# Altium PCB servo_pwr.PcbDoc
Units mm, origin at the board's own origin, x right, y up, seen from the top; angles counter-clockwise.
Board outline 80.6 x 215 mm, 2 copper layers (Top Layer, Bottom Layer), stack 1.57 mm thick; 135 components, 82 nets, 364 pads, 0 vias.
Unrouted connection lines stored in the file: 269.
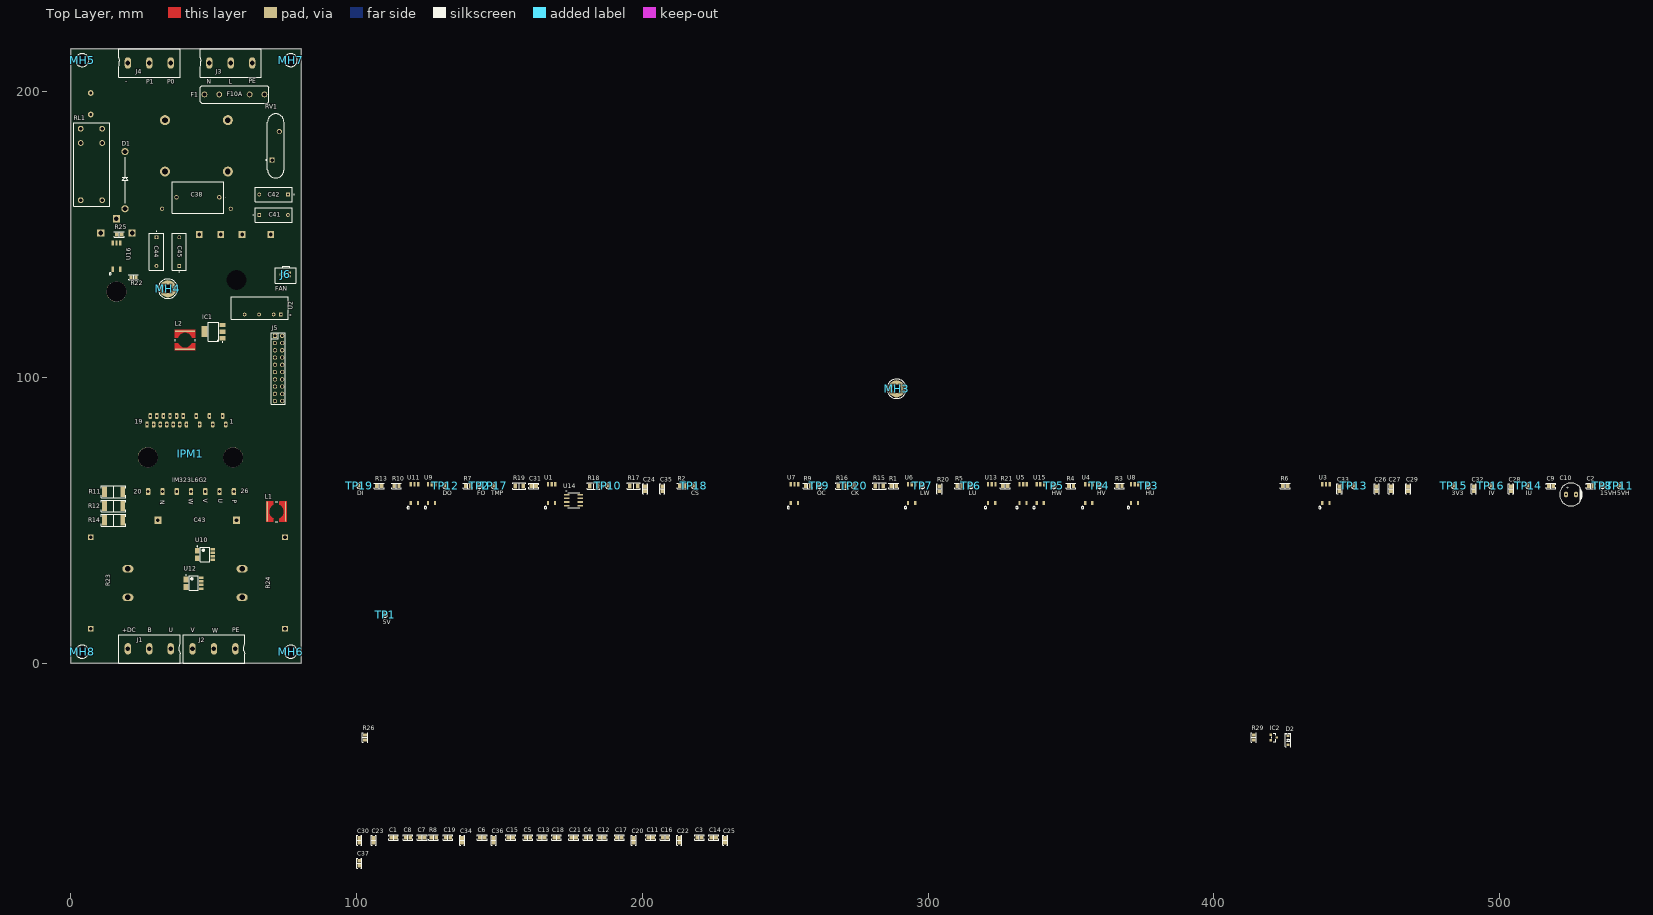
[diagram p0: Top Layer view]
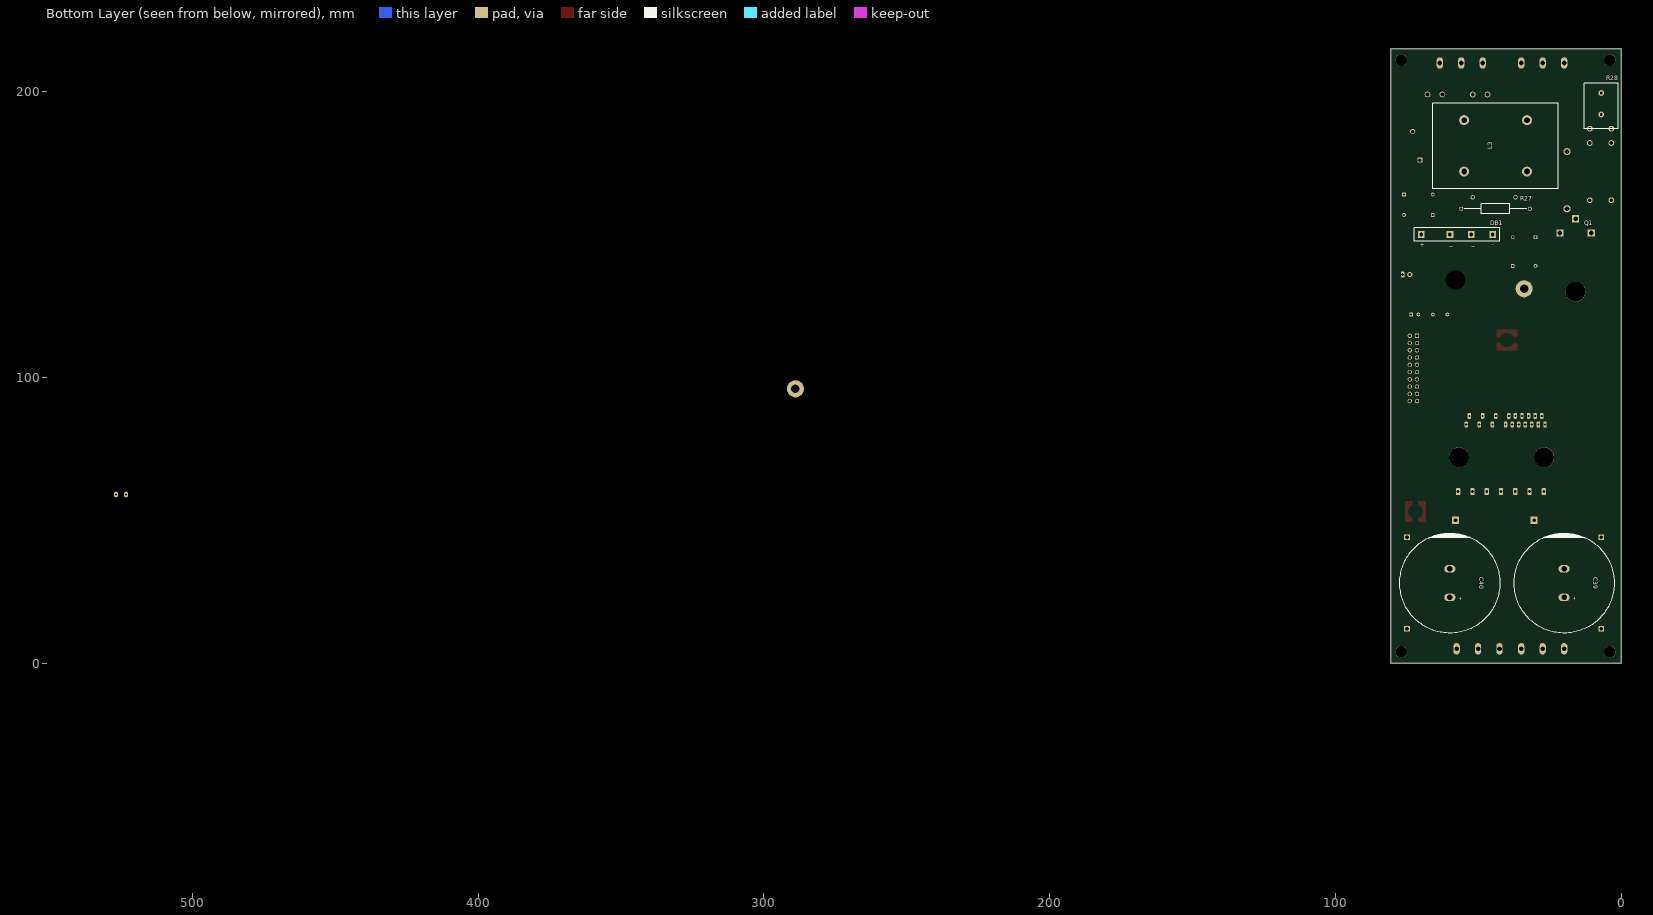
[diagram p1: Bottom Layer view, seen from below]

## Layer stack, top to bottom
Top Solder: solder mask 0.0127, Solder Resist, Dk 3.8
Top Layer: signal copper 0.035
Dielectric: core 1.5, FR-4, Dk 4.5
Bottom Layer: signal copper 0.035
Bottom Solder: solder mask 0.0127, Solder Resist, Dk 3.8

## Board outline
0,0 80.6,0 80.6,215 0,215

## Design rules (kind name [scope] priority, off if disabled: settings)
BoardOutlineClearance [All] p1: gap=0.2 ignorepadtopadclearanceinfootprint=FALSE
Clearance [All] p1: gap=0.127 ignorepadtopadclearanceinfootprint=FALSE except(0.25: Arc-Hole Track-Hole SMDPad-Hole THPad-Hole Via-Hole Fill-Hole Poly-Hole Region-Hole Text-Hole)
ComponentClearance [All] p1: gap=0.127 collisioncheckmode=3 verticalgap=0.127 showdistances=TRUE
DiffPairsRouting [All] p1: maxlimit=0.254 minlimit=0.127 mostfreqgap=0.127 toplayer_minwidth=0.127 toplayer_maxwidth=25.4 toplayer_prefwidth=0.127 bottomlayer_minwidth=0.127 bottomlayer_maxwidth=25.4 bottomlayer_prefwidth=0.127 maxuncoupledlength=12.7
Height [All] p1: minheight=0 maxheight=1816.048 prefheight=12.7
HoleSize [All] p1: absolutevalues=TRUE maxlimit=6.3 minlimit=0.3 maxpercent=80.000 minpercent=20.000
HoleToHoleClearance [All] p1: gap=0.25 allowstackedmicrovias=FALSE
MinimumAnnularRing [All] p1: minimumring=0.076
MinimumSolderMaskSliver [All] p1: minsoldermaskwidth=0
PlaneClearance [All] p1: clearance=0.127
PlaneConnect PlaneConnectPowerPads [InPadClass('PowerPads')] p1: planeconnectstyle=Direct reliefexpansion=0.508 reliefentries=4 reliefconductorwidth=0.254 reliefairgap=0.254
PlaneConnect [All] p2: pad.planeconnectstyle=Relief pad.reliefexpansion=0.3 pad.reliefentries=4 pad.reliefconductorwidth=0.127 pad.reliefairgap=0.127 via.planeconnectstyle=Direct via.reliefexpansion=0.3 via.reliefentries=4 via.reliefconductorwidth=0.127 via.reliefairgap=0.127
PolygonConnect PolygonConnectPowerPads [All vs (InPadClass('PowerPads'))] p1: connectstyle=Direct reliefconductorwidth=0.254 reliefentries=4 polygonreliefangle="90 Angle" airgapwidth=0.254
PolygonConnect [All] p2: thpad.connectstyle=Relief thpad.reliefconductorwidth=0.127 thpad.reliefentries=4 thpad.polygonreliefangle="90 Angle" thpad.airgapwidth=0.127 smdpad.connectstyle=Relief smdpad.reliefconductorwidth=0.127 smdpad.reliefentries=4 smdpad.polygonreliefangle="90 Angle" smdpad.airgapwidth=0.127 via.connectstyle=Direct via.reliefconductorwidth=0.127 via.reliefentries=4 via.polygonreliefangle="90 Angle" via.airgapwidth=0.127
RoutingVias [All] p1: holewidth=0.3 width=0.6 viastyle="Through Hole" minholewidth=0.3 minwidth=0.6 maxholewidth=0.6 maxwidth=6.6
SilkToSilkClearance [All] p1: silktosilkclearance=0
SilkToSolderMaskClearance [IsPad] p1: minsilkscreentomaskgap=0.127 clearancetoexposedcopper=TRUE
SolderMaskExpansion [All] p1: expansion=0.075 istentingtop=FALSE
Width [All] p1: maxlimit=25.4 minlimit=0.127 preferedwidth=0.127 minimp=50.000000 maximp=50.000000 favimp=50.000000
20 further rules are at their usual default settings.

## Classes and differential pairs
component class servo_pwr: J1 J2 J3 J4 J5 J6 MH3 MH4 MH5 MH6 MH7 MH8
component class igbt_output: C1 C2 C3 C4 C5 C6 C7 C8 C9 C10 C11 C12 C13 C14 C15 C16 C17 C18 C19 C20 C21 C22 C23 C24 C25 C26 C27 C28 C29 C30 C31 C32 C33 C34 C35 C36 IC1 IPM1 L1 L2 R1 R2 R3 R4 R5 R6 R7 R8 R9 R10 R11 R12 R13 R14 R15 R16 R17 R18 R19 R20 R21 TP1 TP2 TP3 TP4 TP5 TP6 TP7 TP8 TP9 TP10 TP11 TP12 TP13 TP14 TP15 TP16 TP17 TP18 TP19 TP20 U1 U2 U3 U4 U5 U6 U7 U8 U9 U10 U11 U12 U13 U14 U15
component class DClink: C37 C38 C39 C40 C41 C42 C43 C44 C45 D1 D2 DB1 F1 IC2 L3 Q1 R22 R23 R24 R25 R26 R27 R28 R29 RL1 RV1 U16

## Components (designator, comment, footprint, x,y, rotation, side; value= is the part's Value field where it differs from the comment)
C1 "2.2 µF" "CAP 0805_2012" 113,-61 r0 top
C2 "22 µF" "CAP 0805_2012" 532,62 r0 top
C3 "2.2 µF" "CAP 0805_2012" 220,-61 r0 top
C4 "2.2 µF" "CAP 0805_2012" 181,-61 r0 top
C5 "2.2 µF" "CAP 0805_2012" 160,-61 r0 top
C6 "2.2 µF" "CAP 0805_2012" 144,-61 r0 top
C7 "2.2 µF" "CAP 0805_2012" 123,-61 r0 top
C8 "2.2 µF" "CAP 0805_2012" 118,-61 r0 top
C9 "22 µF" "CAP 0805_2012" 518,62 r0 top
C10 "100 µF" "CAP AL TH D8 L3.5 H12.5" 525,59 r0 top
C11 "2.2 µF" "CAP 0805_2012" 203,-61 r0 top
C12 "2.2 µF" "CAP 0805_2012" 186,-61 r0 top
C13 "2.2 µF" "CAP 0805_2012" 165,-61 r0 top
C14 "2.2 µF" "CAP 0805_2012" 225,-61 r0 top
C15 "2.2 µF" "CAP 0805_2012" 154,-61 r0 top
C16 "2.2 µF" "CAP 0805_2012" 208,-61 r0 top
C17 "2.2 µF" "CAP 0805_2012" 192,-61 r0 top
C18 "2.2 µF" "CAP 0805_2012" 170,-61 r0 top
C19 "2.2 µF" "CAP 0805_2012" 132,-61 r0 top
C20 "2.2 µF" "CAP 0805_2012" 197,-62 r90 top
C21 "2.2 µF" "CAP 0805_2012" 176,-61 r0 top
C22 "2.2 µF" "CAP 0805_2012" 213,-62 r90 top
C23 "2.2 µF" "CAP 0805_2012" 106,-62 r90 top
C24 "10000 pF" "CAP 0805_2012" 201,61 r90 top
C25 "2.2 µF" "CAP 0805_2012" 229,-62 r90 top
C26 "22 µF" "CAP 0805_2012" 457,61 r90 top
C27 "22 µF" "CAP 0805_2012" 462,61 r90 top
C28 "4700 pF" "CAP 0805_2012" 504,61 r90 top
C29 "0.1 µF" "CAP 0805_2012" 468,61 r90 top
C30 "2.2 µF" "CAP 0805_2012" 101,-62 r90 top
C31 "1000 pF" "CAP 0805_2012" 162,62 r0 top
C32 "4700 pF" "CAP 0805_2012" 491,61 r90 top
C33 "0.1 µF" "CAP 0805_2012" 444,61 r90 top
C34 "2.2 µF" "CAP 0805_2012" 137,-62 r90 top
C35 "22 µF" "CAP 0805_2012" 207,61 r90 top
C36 "2.2 µF" "CAP 0805_2012" 148,-62 r90 top
C37 "2.2 µF" "CAP 0805_2012" 101,-70 r90 top
C38 "470n X2 275V" R46KI347050M1K 52,163 r180 top
C39 "470µF" "CAP TH ALUM ELEC D35.00mm S10.00mm H47.00mm" 20,28 r270 bottom
C40 "470µF" "CAP TH ALUM ELEC D35.00mm S10.00mm H47.00mm" 60,28 r270 bottom
C41 "4n7" B32021_(13_x_5) 66,156.823 r0 top
C42 "4n7" B32021_(13_x_5) 76,164 r180 top
C43 "3.3u/600V" C4AQHBU4330P1WJ 30.5,50 r0 top
C44 "4n7" B32021_(13_x_5) 30,149 r270 top
C45 "4n7" B32021_(13_x_5) 38,139 r90 top
D1 "10A6" 10A6 19,159 r90 top
D2 "1N4148W-7-F" SOD-123 426,-27 r90 top
DB1 "Component_1" GBJ2506 70,150 r180 bottom
F1 "Fuse" FUSE 46.8,199 r0 top
IC1 "LD1117S50TR" "ST SOT-223" 50,116 r180 top
IC2 "2N7002E-7-F" "DIODES SOT-23-3" 421,-26 r0 top
IPM1 "IM323L6G2" IM323L6G2 54.3,83.5 r270 top
J1 "DG128-7.5-03P-14" DG128-7.5-03P-14 16.5,5 r0 top
J2 "DG128-7.5-03P-14" DG128-7.5-03P-14 39.127,5 r0 top
J3 "DG128-7.5-03P-14" DG128-7.5-03P-14 67,210 r180 top
J4 "DG128-7.5-03P-14" DG128-7.5-03P-14 38.5,210 r180 top
J5 "goldpin" "goldpin 2x10" 71.46,114.54 r0 top
J6 "FAN" "JST XH 2pin" 76.5,136 r270 top
L1 "1 mH" "BOURNS SRR6028" 72,53 r180 top
L2 "1 mH" "BOURNS SRR6028" 40,113 r90 top
L3 "SC-18-25J" SC18-25J 33,190 r0 bottom
MH3 "Mountinghole_M2,5" "Mountinghole M2,5" 289,96 r0 top
MH4 "Mountinghole_M2,5" "Mountinghole M2,5" 34,131 r0 top
MH5 "Mountinghole_M2,5_nonplated" "Mountinghole M2,5 non plated" 4,211 r0 top
MH6 "Mountinghole_M2,5_nonplated" "Mountinghole M2,5 non plated" 77,4 r0 top
MH7 "Mountinghole_M2,5_nonplated" "Mountinghole M2,5 non plated" 77,211 r0 top
MH8 "Mountinghole_M2,5_nonplated" "Mountinghole M2,5 non plated" 4,4 r0 top
Q1 "STGW30NC60KD" STGW30NC60KD 16,150.5 r180 bottom
R1 "470 Ohms" "RES 0805_2012" 288,62 r0 top
R2 "470 Ohms" "RES 0805_2012" 214,62 r0 top
R3 "470 Ohms" "RES 0805_2012" 367,62 r0 top
R4 "470 Ohms" "RES 0805_2012" 350,62 r0 top
R5 "470 Ohms" "RES 0805_2012" 311,62 r0 top
R6 "470 Ohms" "RES 0805_2012" 425,62 r0 top
R7 "1 kOhms" "RES 0805_2012" 139,62 r0 top
R8 "22 kOhms" "RES 0805_2012" 127,-61 r0 top
R9 "47 Ohms" "RES 0805_2012" 258,62 r0 top
R10 "1 kOhms" "RES 0805_2012" 114,62 r0 top
R11 "150 mOhms" "RES 2512_6432" 15,60 r0 top
R12 "150 mOhms" "RES 2512_6432" 15,55 r0 top
R13 "470 Ohms" "RES 0805_2012" 108,62 r0 top
R14 "150 mOhms" "RES 2512_6432" 15,50 r0 top
R15 "100 kOhms" "RES 1206_3216" 283,62 r0 top
R16 "100 kOhms" "RES 1206_3216" 270,62 r0 top
R17 "100 kOhms" "RES 1206_3216" 197,62 r0 top
R18 "100 kOhms" "RES 1206_3216" 183,62 r0 top
R19 "4.7 kOhms" "RES 1206_3216" 157,62 r0 top
R20 "470 Ohms" "RES 0805_2012" 304,61 r90 top
R21 "470 Ohms" "RES 0805_2012" 327,62 r0 top
R22 "470 Ohms" "RES 0805_2012" 22,135 r180 top
R23 "CRL5W-33k" CRL5W-33k 7,41 r270 top
R24 "CRL5W-33k" CRL5W-33k 75,15 r90 top
R25 "47 Ohms" "RES 0805_2012" 17,150 r0 top
R26 "10 kOhms" "RES 0805_2012" 103,-26 r90 top
R27 "1M" RESAD2400W75L1000D350 32,159 r0 bottom
R28 "PRMAAWJW470B00" prmaawjw470b00 7,192 r90 bottom
R29 "470 Ohms" "RES 0805_2012" 414,-26 r90 top
RL1 "G2R-1A-E" G2R-1A-E 11,162 r90 top
RV1 "SIOV-S20K275" B72220Q0271K101 70.5,176 r90 top
TP1 "5V" Testpoint1,2mm 110,17 r0 top
TP2 "FO" Testpoint1,2mm 143,62 r0 top
TP3 "HU" Testpoint1,2mm 377,62 r0 top
TP4 "HV" Testpoint1,2mm 360,62 r0 top
TP5 "HW" Testpoint1,2mm 344,62 r0 top
TP6 "LU" Testpoint1,2mm 315,62 r0 top
TP7 "LW" Testpoint1,2mm 298,62 r0 top
TP8 "15VH" Testpoint1,2mm 536,62 r0 top
TP9 "OC" Testpoint1,2mm 262,62 r0 top
TP10 "G" Testpoint1,2mm 188,62 r90 top
TP11 "5VH" Testpoint1,2mm 542,62 r90 top
TP12 "DO" Testpoint1,2mm 131,62 r90 top
TP13 "G" Testpoint1,2mm 449,62 r90 top
TP14 "IU" Testpoint1,2mm 510,62 r90 top
TP15 "3V3" Testpoint1,2mm 484,62 r90 top
TP16 "IV" Testpoint1,2mm 497,62 r90 top
TP17 "TMP" Testpoint1,2mm 148,62 r90 top
TP18 "CS" Testpoint1,2mm 218,62 r90 top
TP19 "DI" Testpoint1,2mm 101,62 r90 top
TP20 "CK" Testpoint1,2mm 274,62 r90 top
U1 "TLP2345" TLP2345 167,56 r90 top
U2 "TBA 2-0513" "TBA 2_SINGLE_TRP" 73.54,122 r180 top
U3 "TLP2345" TLP2345 438,56 r90 top
U4 "TLP2345" TLP2345 355,56 r90 top
U5 "TLP2345" TLP2345 332,56 r90 top
U6 "TLP2345" TLP2345 293,56 r90 top
U7 "TLP2345" TLP2345 252,56 r90 top
U8 "TLP2345" TLP2345 371,56 r90 top
U9 "TLP2345" TLP2345 125,56 r90 top
U10 "LEM GO10SME/SP3" TSOP127P600X160-8N 47,38 r0 top
U11 "TLP2345" TLP2345 119,56 r90 top
U12 "LEM GO10SME/SP3" TSOP127P600X160-8N 43,28 r0 top
U13 "TLP2345" TLP2345 321,56 r90 top
U14 "MCP3002-I/SN" SOIC8-N_MC_MCH 176,57 r0 top
U15 "TLP2345" TLP2345 338,56 r90 top
U16 "TLP701" TLP701 14.7,137.8 r90 top

## Footprints (in the part's own frame and the unit in brackets; to place one, negate y for a bottom-side part, rotate by r counter-clockwise, add the part's x,y. Pads: shape width x height; smd on the part's side, far side on the other; paste and mask are expansions set on the pad)
10A6 [mm]
  round 2.5 hole 1.6: A(0,0) K(20,0)
  silkscreen extent 2,-1 18,1
B32021_(13_x_5) [mm]
  rect 1.3x1.3 hole 0.8: 1(0,0)
  round 1.3 hole 0.8: 2(10,0)
  silkscreen extent -2.15,-2.5 11.5,2.5, body extent -1.49,-2.5 11.51,2.5, height 10.79
B72220Q0271K101 [mm]
  rect 1.8x1.8 hole 1.2: 1(0,0)
  round 1.8 hole 1.2: 2(10,-2.5)
  silkscreen extent -6.2,-4.15 16.2,2.25, body extent -6.05,-3.57 15.95,1.02, height 26
"BOURNS SRR6028" [mm] "Precision Wire Wound Inductor, 2-Leads, Body 6.80x6.80mm, IPC Medium Density"
  rect 0.5x7 smd: 1(-3.15,0) 2(3.15,0)
  Top Layer region: 3.6,3.6 1.1,3.6 1.1,2.5 1.4,2.4 1.7,2.1 1.9,2 2.1,1.7 2.3,1.4 2.5,1 2.6,0.7 2.7,0.3 2.7,0 3.6,0
  Top Layer region: 3.6,-3.6 1.1,-3.6 1.1,-2.5 1.4,-2.4 1.7,-2.1 1.9,-2 2.1,-1.7 2.3,-1.4 2.5,-1 2.6,-0.7 2.7,-0.3 2.7,0 3.6,0
  Top Layer region: -3.6,-3.6 -1.1,-3.6 -1.1,-2.5 -1.4,-2.4 -1.7,-2.1 -1.9,-2 -2.1,-1.7 -2.3,-1.4 -2.5,-1 -2.6,-0.7 -2.7,-0.3 -2.7,0 -3.6,0
  Top Layer region: -3.6,3.6 -1.1,3.6 -1.1,2.5 -1.4,2.4 -1.7,2.1 -1.9,2 -2.1,1.7 -2.3,1.4 -2.5,1 -2.6,0.7 -2.7,0.3 -2.7,0 -3.6,0
  Top Layer lines w0.1: 1.1,3.55 1.1,2.5 cw(c0,0) 2.731,0 cw(c0,0) 1.1,-2.5 1.1,-3.55 ; -1.1,3.55 -1.1,2.5 ccw(c0,0) -2.731,0 ccw(c0,0) -1.1,-2.5 -1.1,-3.55
  silkscreen extent -0.4,-3.5 0.4,3.5, body extent -3.4,-3.4 3.4,3.4, height 2.8
C4AQHBU4330P1WJ [mm]
  rect 2.5x2.5 hole 1.3: 1(0,0) 2(27.5,0)
  body extent -2,-5.5 29.5,5.5, height 20
"CAP 0805_2012" [mm] "Chip Capacitor, 2-Leads, Body 2.00x1.20mm, IPC Medium Density"
  rect 1.3x1.4 smd: 1(-0.8,0) 2(0.8,0)
  silkscreen extent -1.7,-0.9 1.7,0.9, body extent -1,-0.64 1,0.64, height 1.26
"CAP AL TH D8 L3.5 H12.5" [mm] "8MM Diameter, 3.5MM Lead Spacing Aluminium Capacitor"
  oval 1.5x2 hole 0.8: 1(-1.75,0) 2(1.75,0)
  silkscreen extent -4,-4 4,4, body extent -4,-4 4,4, height 11.5
"CAP TH ALUM ELEC D35.00mm S10.00mm H47.00mm" [mm] "35mm Diameter 10mm Lead Spacing Aluminum Electrolytic Capacitors Radial, Can , Snap-In"
  oval 2.6x3.9 hole 2: 1(5,0) 2(-5,0)
  silkscreen extent -17.5,-17.5 17.5,17.5, body extent -17.51,-17.5 17.5,17.5, height 47
CRL5W-33k [mm]
  rect 2x2 hole 1.3: 1(-3,0) 2(29,0)
  body extent 1.5,-5 23.5,5, height 9.5
DG128-7.5-03P-14 [mm]
  oval 2.2x4 hole 1.6: 1(3.5,0) 2(11,0) 3(18.5,0)
  silkscreen extent 0.25,-5 21.75,5, body extent -0.25,-5.02 22.25,5, height 13.96
"DIODES SOT-23-3" [mm] "SOT23, 3-Leads, Body 2.90x2.40mm, Pitch 0.95mm, IPC Medium Density"
  rect 0.9x0.8 smd: 1(-1,0.95) 2(-1,-0.95) 3(1,0)
  silkscreen extent -0.7,-1.45 0.7,1.45, body extent -1.41,-1.45 1.41,1.45, height 1.5
FUSE [mm]
  round 2 hole 1.3: 1(0,0) 1(5.2,0) 2(15.8,0) 2(21,0)
  silkscreen extent -1.5,-3 22.5,3, body extent -0.4,-3 21.2,2.8, height 8.35
G2R-1A-E [mm]
  round 2 hole 1.3: 1(0,0) 2(0,7.5) 3(20,0) 3(20,7.5) 4(25,0) 4(25,7.5)
  silkscreen extent -2.1,-2.7 27.1,10, body extent -2.1,-2.7 27.1,10, height 26
GBJ2506 [mm]
  rect 2.4x2.4 hole 1.3: 1(0,0) 2(10,0) 3(17.5,0) 4(25,0)
  round 1.2 hole 7 unplated: ""(12,-16)
  silkscreen extent -2.5,-2.4 27.5,2.4, body extent -3,-25 28,-3.7, height 9.5
"goldpin 2x10" [mm]
  rect 1.5x1.5 hole 1: 1(0,0)
  round 1.5 hole 1: 2(0,-2.54) 3(0,-5.08) 4(0,-7.62) 5(0,-10.16) 6(0,-12.7) 7(0,-15.24) 8(0,-17.78) 9(0,-20.32) 10(0,-22.86) 11(2.54,-22.86) 12(2.54,-20.32) 13(2.54,-17.78) 14(2.54,-15.24) 15(2.54,-12.7) 16(2.54,-10.16) 17(2.54,-7.62) 18(2.54,-5.08) 19(2.54,-2.54) 20(2.54,0)
  silkscreen extent -1.2,-23.9 3.7,1.1
IM323L6G2 [mm]
  rrect50% 2x1.2 hole 0.8: 1(0,0) 2(-3,-1.15) 3(0,-4.6) 4(-3,-5.75) 5(0,-9.2) 6(-3,-10.35) 7(0,-13.8) 8(-3,-14.95) 9(0,-16.1) 10(-3,-17.25) 11(0,-18.4) 12(-3,-19.55) 13(0,-20.7) 14(-3,-21.85) 15(0,-23) 16(-3,-24.15) 17(0,-25.3) 18(-3,-26.45) 19(0,-27.6)
  rrect50% 2.5x1.5 hole 1: 20(23.5,-27.2) 21(23.5,-22.2) 22(23.5,-17.2) 23(23.5,-12.2) 24(23.5,-7.2) 25(23.5,-2.2) 26(23.5,2.8)
  round 7 hole 7 unplated: ""(11.5,2.5) ""(11.5,-27.3)
  body extent -3.17,-28.43 23.63,4.37, height 3.68
"JST XH 2pin" [mm]
  rrect50% 2x1.3 hole 1: 1(0,0)
  round 1.8 hole 1: 2(0,-2.5)
  silkscreen extent -2.9,-5 3,2.4, body extent -2.49,-4.91 3.35,2.31, height 7.21
"Mountinghole M2,5" [mm]
  round 6 hole 3: 1(0,0)
  silkscreen extent -3.4,-3.4 3.4,3.4
"Mountinghole M2,5 non plated" [mm]
  round 4 hole 4 unplated: 1(0,0)
  silkscreen extent -2.3,-2.3 2.3,2.3
prmaawjw470b00 [mm]
  round 2 hole 1: 1(0,0) 2(7.5,0)
  silkscreen extent -5,-6 11,6, body extent -5,-6 11,6, height 35
R46KI347050M1K [mm]
  round 1.5 hole 1: 1(0,0) 2(15,0)
  silkscreen extent -2.1,-5.5 16.5,5.5, body extent -1.75,-5.61 16.75,5.6, height 19.01
"RES 0805_2012" [mm] "Chip Resistor, 2-Leads, Body 2.00x1.25mm, IPC Medium Density"
  rect 1.15x1.35 smd: 1(-0.875,0) 2(0.875,0)
  silkscreen extent -1.7,-0.9 1.7,0.9, body extent -1,-0.62 1,0.63, height 0.6
"RES 1206_3216" [mm] "Chip Resistor, 2-Leads, Body 3.13x1.55mm, IPC Medium Density"
  rect 1.2x1.65 smd: 1(-1.4,0) 2(1.4,0)
  silkscreen extent -2.3,-1.1 2.3,1.1, body extent -1.6,-0.8 1.6,0.8, height 0.6
"RES 2512_6432" [mm] "Chip Resistor, 2-Leads, Body 6.30x3.15mm, IPC Medium Density"
  rect 1.6x3.65 smd: 1(-3.175,0) 2(3.175,0)
  silkscreen extent -4.3,-2.05 4.3,2.05, body extent -3.15,-1.57 3.15,1.57, height 0.7
RESAD2400W75L1000D350 [mm]
  round 1.425 hole 0.95: 1(0,0) 2(24,0)
  silkscreen extent 1.06,-1.75 22.94,1.75, body extent -0.37,-1.75 24.38,1.75, height 3.5
SC18-25J [mm]
  round 3.5 hole 2: 1(0,0) 2(0,18) 3(22,0) 4(22,18)
  silkscreen extent -11,-6 33,24, body extent -11,-6 33,24, height 43.39
SOD-123 [mm] "SOD, 2-Leads, Body 1.55x3.70mm, IPC Medium Density"
  rect 0.9x0.95 smd: 1(-1.575,0) 2(1.575,0)
  silkscreen extent -2.3,-0.92 2.41,0.92, body extent -1.86,-0.78 1.86,0.77, height 1.35
SOIC8-N_MC_MCH [mm]
  rect 1.97x0.558 smd paste+0 mask+0: 1(-2.362,1.905) 2(-2.362,0.635) 3(-2.362,-0.635) 4(-2.362,-1.905) 5(2.362,-1.905) 6(2.362,-0.635) 7(2.362,0.635) 8(2.362,1.905)
  silkscreen extent -2.08,-2.58 2.08,2.58, body extent -3,-2.45 3,2.45, height 1.76
"ST SOT-223" [mm] "SOT223, 4-Leads, Body 6.50x7.00mm (avg), Pitch 2.30mm, IPC Medium Density"
  rect 2x1.5 smd: 1(-3.15,2.3) 2(-3.15,0) 3(-3.15,-2.3)
  rect 2x3.8 smd: 4(3.15,0)
  silkscreen extent -3.27,-3.35 1.85,3.72, body extent -3.52,-3.25 3.5,3.25, height 1.8
STGW30NC60KD [mm]
  rect 2.5x2.5 hole 1.6: 1(-5.5,0) 2(0,5) 3(5.5,0)
  round 7 hole 7 unplated: ""(0,-20.5)
  body extent -8,-24.5 8,-4, height 9.5
"TBA 2_SINGLE_TRP" [mil]
  rect 50x50 hole 30 mask+0: 1(0,0)
  round 50 hole 30 mask+0: 2(100,0) 4(300,0) 6(500,0)
  silkscreen extent -100,-245 680,64, body extent -85,-240 685,59, height 402
Testpoint1,2mm [mm]
  round 1.2 smd: 1(0,0)
  silkscreen extent -0.92,-0.92 0.92,0.92
TLP701 [mm]
  rect 1.9x0.8 smd: 1(0,0) 3(0,-2.6) 4(9.2,-2.6) 5(9.2,-1.3) 6(9.2,0)
  silkscreen extent -1.96,0.54 -1.24,1.26, body extent -0.35,-3.59 9.35,0.99, height 4
TLP2345 [mm]
  rect 1.5x0.8 smd: 1(0,0) 3(0,-2.5) 4(6.6,-2.6) 5(6.6,-1.3) 6(6.6,0)
  silkscreen extent -2.02,0.48 -1.18,1.32, body extent -0.3,-3.15 6.7,0.55, height 2.2
TSOP127P600X160-8N [mm] "TSOP, 8-Leads, Body 4,90x3,95mm, Pitch 1,27mm, IPC Medium Density"
  rect 1.6x0.85 smd: 1(-2.667,1.905) 4(-2.667,-1.905) 5(2.7,-1.905) 6(2.7,-0.635) 7(2.7,0.635) 8(2.7,1.905)
  rect 1.6x1.2 smd: 2(-2.667,0.889)
  rect 1.6x1.25 smd: 3(-2.667,-0.889)
  silkscreen extent -2.82,-2.5 1.6,3, body extent -2.95,-2.5 2.95,2.5, height 1.6

## Part data
C1 C3 C4 C5 C6 C7 C8 C11 C12 C13 C14 C15 C16 C17 C18 C19 C20 C21 C22 C23 C25 C30 C34 C36 C37: library part C2012X7R1V225K125AB, "CAP CER 2.2UF 35V X7R 0805", Device Package="0805 (2012 Metric)", manufacturer="TDK Corporation", Operating Temperature="-55°C ~ 125°C", Supplier Part Number 1=445-7551-1-ND, Temperature Coefficient=X7R, Tolerance=±10%, Voltage - Rated=35V, Applications="General Purpose", Capacitance="2.2 µF", componentlink1description=Datasheet, componentlink1url=https://product.tdk.com/info/en/catalog/datasheets/mlcc_commercial_general_en.pdf?ref_disty=digikey, componentlink2description="DigiKey Link", componentlink2url=https://www.digikey.com/en/products/detail/tdk-corporation/C2012X7R1V225K125AB/2732986, Features="Low ESL", lastupdated="03.01.2023 20:10:54", Lifecycle Status=Active, Minimum Order=1, Mounting Type="Surface Mount, MLCC", Package / Case="0805 (2012 Metric)", packaging=TapeAndReel, Part Number=C2012X7R1V225K125AB, Part Status=Active, partid=3412, price=0.12, series=C, Size / Dimension="0.079\" L x 0.049\" W (2.00mm x 1.25mm)", Supplier 1=DigiKey, Thickness (Max)="0.057\" (1.45mm)"
C2 C9 C26 C27 C35: library part CL21A226KOQNNNG, "CAP CER 22UF 16V X5R 0805", Device Package="0805 (2012 Metric)", manufacturer="Samsung Electro-Mechanics", Operating Temperature="-55°C ~ 85°C", Supplier Part Number 1=1276-7092-1-ND, Temperature Coefficient=X5R, Tolerance=±10%, Voltage - Rated=16V, Applications="General Purpose", Capacitance="22 µF", componentlink1description=Datasheet, componentlink1url=//media.digikey.com/pdf/Data%20Sheets/Samsung%20PDFs/CL21A226KOQNNNG_Spec.pdf, componentlink2description="DigiKey Link", componentlink2url=https://www.digikey.com/en/products/detail/samsung-electro-mechanics/CL21A226KOQNNNG/3894433, lastupdated="03.01.2023 20:10:55", Lifecycle Status=Active, Minimum Order=1, Mounting Type="Surface Mount, MLCC", Package / Case="0805 (2012 Metric)", packaging=TapeAndReel, Part Number=CL21A226KOQNNNG, Part Status=Active, partid=3000, price=0.06, series=CL, Size / Dimension="0.079\" L x 0.049\" W (2.00mm x 1.25mm)", Supplier 1=DigiKey, Thickness (Max)="0.055\" (1.40mm)"
C10: library part EEU-TA1E101, "CAP ALUM 100UF 20% 25V RADIAL", Device Package="Radial, Can", Lifetime @ Temp.="2000 Hrs @ 125°C", manufacturer="Panasonic Electronic Components", Operating Temperature="-40°C ~ 125°C", Ripple Current @ High Frequency="500 mA @ 100 kHz", Ripple Current @ Low Frequency="325 mA @ 120 Hz", Supplier Part Number 1=P19501-ND, Tolerance=±20%, Voltage - Rated="25 V", Applications="General Purpose", Capacitance="100 µF", componentlink1description=Datasheet, componentlink1url=http://industrial.panasonic.com/www-cgi/jvcr13pz.cgi?E+PZ+3+ABA0028+EEUTA1E101+8+WW, componentlink2description="DigiKey Link", componentlink2url=https://www.digikey.com/en/products/detail/panasonic-electronic-components/EEU-TA1E101/2689893, Height - Seated (Max)="0.492\" (12.50mm)", Impedance="130 mOhms", lastupdated="02.01.2023 21:00:54", Lead Spacing="0.138\" (3.50mm)", Lifecycle Status=Active, Minimum Order=1, Mounting Type="Through Hole", Package / Case="Radial, Can", packaging=Bulk, Part Number=EEU-TA1E101, Part Status=Active, partid=7202, Polarization=Polar, price=0.31, series=TA, Size / Dimension="0.315\" Dia (8.00mm)", Supplier 1=DigiKey
C24: library part C0805C103K5RECAUTO, "CAP CER 0805 10NF 50V X7R 10%", Device Package="0805 (2012 Metric)", manufacturer=KEMET, Operating Temperature="-55°C ~ 125°C", Ratings=AEC-Q200, Supplier Part Number 1=399-17885-1-ND, Temperature Coefficient=X7R, Tolerance=±10%, Voltage - Rated=50V, Applications="Automotive, ESD Protection", Capacitance="10000 pF", componentlink1description=Datasheet, componentlink1url=https://api.kemet.com/component-edge/download/datasheet/C0805C103K5RECAUTO.pdf, componentlink2description="DigiKey Link", componentlink2url=https://www.digikey.com/en/products/detail/kemet/C0805C103K5RECAUTO/8640479, lastupdated="03.01.2023 20:10:42", Lifecycle Status=Active, Minimum Order=1, Mounting Type="Surface Mount, MLCC", Package / Case="0805 (2012 Metric)", packaging=TapeAndReel, Part Number=C0805C103K5RECAUTO, Part Status=Active, partid=8498, price=0.04, series="ESD SMD Auto X7R", Size / Dimension="0.079\" L x 0.049\" W (2.00mm x 1.25mm)", Supplier 1=DigiKey, Thickness (Max)="0.035\" (0.88mm)"
C28 C32: library part C0805C472K5RECAUTO, "CAP CER 0805 4.7NF 50V X7R 10%", Device Package="0805 (2012 Metric)", manufacturer=KEMET, Operating Temperature="-55°C ~ 125°C", Ratings=AEC-Q200, Supplier Part Number 1=399-17884-1-ND, Temperature Coefficient=X7R, Tolerance=±10%, Voltage - Rated=50V, Applications="Automotive, ESD Protection", Capacitance="4700 pF", componentlink1description=Datasheet, componentlink1url=https://api.kemet.com/component-edge/download/datasheet/C0805C472K5RECAUTO.pdf, componentlink2description="DigiKey Link", componentlink2url=https://www.digikey.com/en/products/detail/kemet/C0805C472K5RECAUTO/8640478, lastupdated="03.01.2023 20:10:48", Lifecycle Status=Active, Minimum Order=1, Mounting Type="Surface Mount, MLCC", Package / Case="0805 (2012 Metric)", packaging=TapeAndReel, Part Number=C0805C472K5RECAUTO, Part Status=Active, partid=5836, price=0.04, series="ESD SMD Auto X7R", Size / Dimension="0.079\" L x 0.049\" W (2.00mm x 1.25mm)", Supplier 1=DigiKey, Thickness (Max)="0.035\" (0.88mm)"
C29 C33: library part CC0805MRX7R9BB104, "CAP CER 0.1UF 50V X7R 0805", Device Package="0805 (2012 Metric)", manufacturer=Yageo, Operating Temperature="-55°C ~ 125°C", Supplier Part Number 1=311-4351-1-ND, Temperature Coefficient=X7R, Tolerance=±20%, Voltage - Rated=50V, Applications="General Purpose", Capacitance="0.1 µF", componentlink1description=Datasheet, componentlink1url=https://www.yageo.com/upload/media/product/productsearch/datasheet/mlcc/UPY-GPHC_X7R_6.3V-to-50V_18.pdf, componentlink2description="DigiKey Link", componentlink2url=https://www.digikey.com/en/products/detail/yageo/CC0805MRX7R9BB104/5884281, lastupdated="03.01.2023 20:10:56", Lifecycle Status=Active, Minimum Order=1, Mounting Type="Surface Mount, MLCC", Package / Case="0805 (2012 Metric)", packaging=TapeAndReel, Part Number=CC0805MRX7R9BB104, Part Status=Active, partid=2475, price=0.02, series=CC, Size / Dimension="0.079\" L x 0.049\" W (2.00mm x 1.25mm)", Supplier 1=DigiKey, Thickness (Max)="0.037\" (0.95mm)"
C31: library part C0805X102J5HACAUTO, "CAP CER 0805 1NF 50V ULTRA STABL", Device Package="0805 (2012 Metric)", manufacturer=KEMET, Operating Temperature="-55°C ~ 150°C", Ratings=AEC-Q200, Supplier Part Number 1=399-16876-1-ND, Temperature Coefficient=X8R, Tolerance=±5%, Voltage - Rated=50V, Applications="Automotive, Boardflex Sensitive", Capacitance="1000 pF", componentlink1description=Datasheet, componentlink1url=https://api.kemet.com/component-edge/download/datasheet/C0805X102J5HACAUTO.pdf, componentlink2description="DigiKey Link", componentlink2url=https://www.digikey.com/en/products/detail/kemet/C0805X102J5HACAUTO/8324462, Features="Low ESL, Soft Termination, High Temperature", lastupdated="03.01.2023 20:10:49", Lifecycle Status=Active, Minimum Order=1, Mounting Type="Surface Mount, MLCC", Package / Case="0805 (2012 Metric)", packaging=TapeAndReel, Part Number=C0805X102J5HACAUTO, Part Status=Active, partid=5533, price=0.03, series="SMD Auto X8R HT150C Flex", Size / Dimension="0.079\" L x 0.049\" W (2.00mm x 1.25mm)", Supplier 1=DigiKey, Thickness (Max)="0.039\" (0.98mm)"
C38: library part R46KI347050M1K, "KEMET R46KI347050M1K", Manufacturer_Name=KEMET, Mouser Part Number=80-R46KI347050M1K, Arrow Part Number=R46KI347050M1K, Arrow Price/Stock=https://www.arrow.com/en/products/r46ki347050m1k/kemet-corporation, Datasheet Link=https://content.kemet.com/datasheets/KEM_F3093_R46_X2_275_110C.pdf, Height=19.1mm, Manufacturer_Part_Number=R46KI347050M1K, Mouser Price/Stock=https://www.mouser.co.uk/ProductDetail/KEMET/R46KI347050M1K?qs=D0iH%252BVFiYPOUls74bzoCnw%3D%3D
C39 C40: library part 450HXG470MEFCSN35X45, "CAP ALUM 470UF 20% 450V SNAP", Device Package="Radial, Can - Snap-In", Lifetime @ Temp.="3000 Hrs @ 105°C", manufacturer=Rubycon, Operating Temperature="-25°C ~ 105°C", Ripple Current @ High Frequency="4.088A @ 10kHz", Ripple Current @ Low Frequency="2.92A @ 120Hz", Supplier Part Number 1=1189-1975-ND, Tolerance=±20%, Voltage - Rated=450V, Applications="General Purpose", Capacitance=470µF, componentlink1description=Datasheet, componentlink1url=http://www.rubycon.co.jp/en/catalog/e_pdfs/aluminum/e_HXG.pdf, componentlink2description="DigiKey Link", componentlink2url=http://digikey.com/product-detail/en/rubycon/450HXG470MEFCSN35X45/1189-1975-ND/3986874, Height - Seated (Max)="1.850\" (47.00mm)", lastupdated="29.09.2020 01:08:39", Lead Spacing="0.394\" (10.00mm)", Lifecycle Status=Active, Minimum Order=1, Mounting Type="Through Hole", Package / Case="Radial, Can - Snap-In", packaging=Bulk, Part Number=450HXG470MEFCSN35X45, Part Status=Active, partid=26666, Polarization=Polar, price=8.55, series=HXG, Size / Dimension="1.378\" Dia (35.00mm)", Supplier 1=DigiKey
C41 C42 C44 C45: library part B32021A3472K289, "B32021A3472", Manufacturer_Name=TDK, Mouser Part Number=871-B32021A3472K289, Arrow Part Number=B32021A3472K289, Arrow Price/Stock=https://www.arrow.com/en/products/b32021a3472k289/epcos-tdk, Datasheet Link=https://product.tdk.com/system/files/dam/doc/product/capacitor/film/emi/data_sheet/20/20/db/fc_2009/y2_b32021_026.pdf, Manufacturer_Part_Number=B32021A3472K289, Mouser Price/Stock=https://www.mouser.co.uk/ProductDetail/EPCOS-TDK/B32021A3472K289?qs=FNSAlmj86E3UPc1%2F593FMg%3D%3D
D2: "DIODE GEN PURP 100V 300MA SOD123", Capacitance @ Vr, F="2pF @ 0V, 1MHz", Current - Average Rectified (Io)="300mA (DC)", Current - Reverse Leakage @ Vr="1 µA @ 100 V", manufacturer="Diodes Incorporated", Operating Temperature - Junction="-55°C ~ 150°C", Package / Case=SOD-123, Supplier Part Number 1=1N4148W-FDICT-ND, Voltage - DC Reverse (Vr) (Max)="100 V", Voltage - Forward (Vf) (Max) @ If="1.25 V @ 150 mA", componentlink1description=Datasheet, componentlink1url=https://www.diodes.com/assets/Datasheets/ds30086.pdf, componentlink2description="DigiKey Link", componentlink2url=https://www.digikey.com/en/products/detail/diodes-incorporated/1N4148W-7-F/814371, Diode Type=Standard, lastupdated="02.01.2023 20:53:45", Lifecycle Status=Active, Minimum Order=1, Mounting Type="Surface Mount", packaging=TapeAndReel, Part Number=1N4148W-7-F, Part Status=Active, partid=1002, price=0.02, Reverse Recovery Time (trr)="4 ns", series=-, Speed="Small Signal =< 200mA (Io), Any Speed", Supplier 1=DigiKey, Supplier Device Package=SOD-123
F1: "Fuse holder 04450001N"
IC1: "IC REG LINEAR 5V 800MA SOT223", Current - Output=800mA, Current - Quiescent (Iq)="10 mA", manufacturer=STMicroelectronics, Operating Temperature="0°C ~ 125°C", Package / Case="TO-261-4, TO-261AA", Supplier Device Package=SOT-223, Supplier Part Number 1=497-6447-1-ND, Voltage - Input (Max)=15V, Voltage - Output (Min/Fixed)=5V, Voltage Dropout (Max)="1.2V @ 800mA", componentlink1description=Datasheet, componentlink1url=http://www.st.com/content/ccc/resource/technical/document/datasheet/99/3b/7d/91/91/51/4b/be/CD00000544.pdf/files/CD00000544.pdf/jcr:content/translations/en.CD00000544.pdf, componentlink2description="DigiKey Link", componentlink2url=https://www.digikey.com/en/products/detail/stmicroelectronics/LD1117S50TR/1038360, lastupdated="02.01.2023 21:04:19", Lifecycle Status=Active, Minimum Order=1, Mounting Type="Surface Mount", Number of Regulators=1, Output Configuration=Positive, Output Type=Fixed, packaging=TapeAndReel, Part Number=LD1117S50TR, Part Status=Active, price=0.25, Protection Features="Over Current, Over Temperature", PSRR="75dB (120Hz)", series=-, Supplier 1=DigiKey
IC2: "MOSFET N-CH 60V 0.25A SOT23-3", Current - Continuous Drain (Id) @ 25°C="250mA (Ta)", Drain to Source Voltage (Vdss)=60V, Drive Voltage (Max Rds On,  Min Rds On)="4.5V, 10V", Input Capacitance (Ciss) (Max) @ Vds="50pF @ 25V", manufacturer="Diodes Incorporated", Operating Temperature="-55°C ~ 150°C (TJ)", Package / Case="TO-236-3, SC-59, SOT-23-3", Power Dissipation (Max)="370mW (Ta)", Supplier Device Package=SOT-23-3, Supplier Part Number 1=2N7002E-FDICT-ND, componentlink1description=Datasheet, componentlink1url=https://www.diodes.com/assets/Datasheets/ds30376.pdf, componentlink2description="DigiKey Link", componentlink2url=http://digikey.com/product-detail/en/diodes-incorporated/2N7002E-7-F/2N7002E-FDICT-ND/3877406, FET Type=N-Channel, Gate Charge (Qg) (Max) @ Vgs="0.22nC @ 4.5V", lastupdated="02.01.2023 21:04:52", Lifecycle Status=Active, Minimum Order=1, Mounting Type="Surface Mount", packaging=TapeAndReel, Part Number=2N7002E-7-F, Part Status=Active, price=0.05, Rds On (Max) @ Id, Vgs="3Ohm @ 250mA, 10V", series=-, Supplier 1=DigiKey, Technology="MOSFET (Metal Oxide)", Vgs (Max)=±20V, Vgs(th) (Max) @ Id="2.5V @ 250µA"
J6: library part "JST 2pin"
L1 L2: library part SRR6028-102Y, "FIXED IND 1MH 150MA 4.5 OHM SMD", Current - Saturation=170mA, Current Rating (Amps)="150 mA", DC Resistance (DCR)="4.5Ohm Max", Device Package=Nonstandard, Frequency - Self Resonant=7MHz, Inductance Frequency - Test="100 kHz", manufacturer="Bourns Inc.", Operating Temperature="-40°C ~ 125°C", Q @ Freq="32 @ 252kHz", Supplier Part Number 1=SRR6028-102YCT-ND, Tolerance=±30%, componentlink1description=Datasheet, componentlink1url=https://www.bourns.com/docs/Product-Datasheets/SRR6028.pdf, componentlink2description="DigiKey Link", componentlink2url=https://www.digikey.com/en/products/detail/bourns-inc/SRR6028-102Y/2563578, Height - Seated (Max)="0.118\" (3.00mm)", Inductance="1 mH", lastupdated="02.01.2023 20:58:53", Lifecycle Status=Active, Material - Core=Ferrite, Minimum Order=1, Mounting Type="Surface Mount", Package / Case=Nonstandard, packaging=TapeAndReel, Part Number=SRR6028-102Y, Part Status=Active, partid=60, price=0.34, series=SRR6028, Shielding=Shielded, Size / Dimension="0.268\" L x 0.268\" W (6.80mm x 6.80mm)", Supplier 1=DigiKey, Type="Drum Core, Wirewound"
L3: "https://www.tme.eu/pl/details/sc-18-25j/dlawiki-pierscieniowe/kemet/"
R1 R2 R3 R4 R5 R6 R13 R20 R21 R22 R29: library part ERJ-PB6B4700V, "RES SMD 470 OHM 0.1% 1/4W 0805", Device Package="0805 (2012 Metric)", manufacturer="Panasonic Electronic Components", Operating Temperature="-55°C ~ 155°C", Power (Watts)="0.25W, 1/4W", Ratings=AEC-Q200, Supplier Device Package=0805, Supplier Part Number 1=P20556CT-ND, Temperature Coefficient=±50ppm/°C, Tolerance=±0.1%, componentlink1description=Datasheet, componentlink1url=https://industrial.panasonic.com/cdbs/www-data/pdf/RDM0000/AOA0000C328.pdf, componentlink2description="DigiKey Link", componentlink2url=https://www.digikey.com/en/products/detail/panasonic-electronic-components/ERJ-PB6B4700V/6213339, Composition="Thick Film", Features="Automotive AEC-Q200, Pulse Withstanding", Height - Seated (Max)="0.028\" (0.70mm)", lastupdated="02.01.2023 20:44:49", Lifecycle Status=Active, Minimum Order=1, Number of Terminations=2, Package / Case="0805 (2012 Metric)", packaging=TapeAndReel, Part Number=ERJ-PB6B4700V, Part Status=Active, partid=28402, price=0.04, Resistance="470 Ohms", series=ERJ-PB6, Size / Dimension="0.079\" L x 0.049\" W (2.00mm x 1.25mm)", Supplier 1=DigiKey
R7 R10: library part RNCS0805BKE1K00, "RES 1K OHM 0.1% 1/10W 0805", Device Package="0805 (2012 Metric)", manufacturer="Stackpole Electronics Inc", Operating Temperature="-55°C ~ 155°C", Power (Watts)="0.1W, 1/10W", Ratings=AEC-Q200, Supplier Device Package=0805, Supplier Part Number 1=RNCS0805BKE1K00CT-ND, Temperature Coefficient=±25ppm/°C, Tolerance=±0.1%, componentlink1description=Datasheet, componentlink1url=https://www.seielect.com/catalog/sei-rncs_rnch.pdf, componentlink2description="DigiKey Link", componentlink2url=https://www.digikey.com/en/products/detail/stackpole-electronics-inc/RNCS0805BKE1K00/1800073, Composition="Thin Film", Features="Anti-Corrosive, Automotive AEC-Q200, Moisture Resistant", Height - Seated (Max)="0.026\" (0.65mm)", lastupdated="02.01.2023 20:44:52", Lifecycle Status=Active, Minimum Order=1, Number of Terminations=2, Package / Case="0805 (2012 Metric)", packaging=TapeAndReel, Part Number=RNCS0805BKE1K00, Part Status=Active, partid=27715, price=0.09, Resistance="1 kOhms", series=RNCS, Size / Dimension="0.079\" L x 0.049\" W (2.00mm x 1.25mm)", Supplier 1=DigiKey
R8: library part CRGCQ0805J22K, "RES 22K OHM 5% 1/8W 0805", Device Package="0805 (2012 Metric)", manufacturer="TE Connectivity Passive Product", Operating Temperature="-55°C ~ 155°C", Power (Watts)="0.125W, 1/8W", Ratings=AEC-Q200, Supplier Device Package=0805, Supplier Part Number 1=A130142CT-ND, Temperature Coefficient=±100ppm/°C, Tolerance=±5%, componentlink1description=Datasheet, componentlink1url=https://www.te.com/commerce/DocumentDelivery/DDEController?Action=srchrtrv&DocNm=1773204-3&DocType=DS&DocLang=English, componentlink2description="DigiKey Link", componentlink2url=https://www.digikey.com/en/products/detail/te-connectivity-passive-product/CRGCQ0805J22K/8576744, Composition="Thick Film", Features="Automotive AEC-Q200, Moisture Resistant", Height - Seated (Max)="0.026\" (0.65mm)", lastupdated="02.01.2023 20:44:45", Lifecycle Status=Active, Minimum Order=1, Number of Terminations=2, Package / Case="0805 (2012 Metric)", packaging=TapeAndReel, Part Number=CRGCQ0805J22K, Part Status=Active, partid=29521, price=0.01, Resistance="22 kOhms", series=CRGCQ, Size / Dimension="0.079\" L x 0.049\" W (2.00mm x 1.25mm)", Supplier 1=DigiKey
R9 R25: library part CRGP0805F47R, "RES 47 OHM 1% 1/3W 0805", Device Package="0805 (2012 Metric)", manufacturer="TE Connectivity Passive Product", Operating Temperature="-55°C ~ 155°C", Power (Watts)="0.333W, 1/3W", Supplier Device Package=0805, Supplier Part Number 1=A130461CT-ND, Temperature Coefficient=±200ppm/°C, Tolerance=±1%, componentlink1description=Datasheet, componentlink1url=https://www.te.com/commerce/DocumentDelivery/DDEController?Action=srchrtrv&DocNm=9-1773463-9&DocType=DS&DocLang=English, componentlink2description="DigiKey Link", componentlink2url=https://www.digikey.com/en/products/detail/te-connectivity-passive-product/CRGP0805F47R/8577063, Composition="Thick Film", Features="Pulse Withstanding", Height - Seated (Max)="0.026\" (0.65mm)", lastupdated="02.01.2023 20:44:48", Lifecycle Status=Active, Minimum Order=1, Number of Terminations=2, Package / Case="0805 (2012 Metric)", packaging=TapeAndReel, Part Number=CRGP0805F47R, Part Status=Active, partid=28763, price=0.03, Resistance="47 Ohms", series=CRGP, Size / Dimension="0.079\" L x 0.049\" W (2.00mm x 1.25mm)", Supplier 1=DigiKey
R11 R12 R14: library part TLRH3AWTTER150F, "RES 150M OHM 1% 2W 2512", Device Package="2512 (6432 Metric)", manufacturer="KOA Speer Electronics, Inc.", Operating Temperature="-65°C ~ 170°C", Power (Watts)=2W, Ratings=AEC-Q200, Supplier Device Package=2512, Supplier Part Number 1=2019-TLRH3AWTTER150FCT-ND, Temperature Coefficient=±50ppm/°C, Tolerance=±1%, componentlink1description=Datasheet, componentlink1url=http://www.koaspeer.com/catimages/Products/TLRH/TLRH.pdf, componentlink2description="DigiKey Link", componentlink2url=http://digikey.com/product-detail/en/koa-speer-electronics-inc/TLRH3AWTTER150F/2019-TLRH3AWTTER150FCT-ND/9847534, Composition="Metal Element", Features="Automotive AEC-Q200, Current Sense", Height - Seated (Max)="0.028\" (0.70mm)", lastupdated="02.09.2020 01:27:01", Lifecycle Status=Active, Minimum Order=1, Number of Terminations=2, Package / Case="2512 (6432 Metric)", packaging=TapeAndReel, Part Number=TLRH3AWTTER150F, Part Status=Active, price=0.57, Resistance="150 mOhms", series=TLRH, Size / Dimension="0.248\" L x 0.126\" W (6.30mm x 3.20mm)", Supplier 1=DigiKey
R15 R16 R17 R18: library part RT1206BRB07100KL, "RES SMD 100K OHM 0.1% 1/4W 1206", Device Package="1206 (3216 Metric)", manufacturer=Yageo, Operating Temperature="-55°C ~ 155°C", Power (Watts)="0.25W, 1/4W", Supplier Device Package=1206, Supplier Part Number 1=YAG5016CT-ND, Temperature Coefficient=±10ppm/°C, Tolerance=±0.1%, componentlink1description=Datasheet, componentlink1url=https://www.yageo.com/upload/media/product/productsearch/datasheet/rchip/PYu-RT_1-to-0.01_RoHS_L_11.pdf, componentlink2description="DigiKey Link", componentlink2url=https://www.digikey.com/en/products/detail/yageo/RT1206BRB07100KL/5936250, Composition="Thin Film", Height - Seated (Max)="0.026\" (0.65mm)", lastupdated="02.01.2023 20:37:38", Lifecycle Status=Active, Minimum Order=1, Number of Terminations=2, Package / Case="1206 (3216 Metric)", packaging=TapeAndReel, Part Number=RT1206BRB07100KL, Part Status=Active, partid=26928, price=0.23, Resistance="100 kOhms", series=RT, Size / Dimension="0.122\" L x 0.063\" W (3.10mm x 1.60mm)", Supplier 1=DigiKey
R19: library part CRG1206F4K7, "RES SMD 4.7K OHM 1% 1/4W 1206", Device Package="1206 (3216 Metric)", manufacturer="TE Connectivity Passive Product", Operating Temperature="-55°C ~ 155°C", Power (Watts)="0.25W, 1/4W", Supplier Device Package=1206, Supplier Part Number 1=A106078CT-ND, Temperature Coefficient=±100ppm/°C, Tolerance=±1%, componentlink1description=Datasheet, componentlink1url=https://www.te.com/commerce/DocumentDelivery/DDEController?Action=srchrtrv&DocNm=1773204&DocType=DS&DocLang=English, componentlink2description="DigiKey Link", componentlink2url=https://www.digikey.com/en/products/detail/te-connectivity-passive-product/CRG1206F4K7/2381014, Composition="Thick Film", Height - Seated (Max)="0.026\" (0.65mm)", lastupdated="02.01.2023 20:37:38", Lifecycle Status=Active, Minimum Order=1, Number of Terminations=2, Package / Case="1206 (3216 Metric)", packaging=TapeAndReel, Part Number=CRG1206F4K7, Part Status=Active, partid=26987, price=0.01, Resistance="4.7 kOhms", series="CRG, Neohm", Size / Dimension="0.122\" L x 0.061\" W (3.10mm x 1.55mm)", Supplier 1=DigiKey
R26: library part RNCS0805BKE10K0, "RES 10K OHM 0.1% 1/10W 0805", Device Package="0805 (2012 Metric)", manufacturer="Stackpole Electronics Inc", Operating Temperature="-55°C ~ 155°C", Power (Watts)="0.1W, 1/10W", Ratings=AEC-Q200, Supplier Device Package=0805, Supplier Part Number 1=RNCS0805BKE10K0CT-ND, Temperature Coefficient=±25ppm/°C, Tolerance=±0.1%, componentlink1description=Datasheet, componentlink1url=https://www.seielect.com/catalog/sei-rncs_rnch.pdf, componentlink2description="DigiKey Link", componentlink2url=https://www.digikey.com/en/products/detail/stackpole-electronics-inc/RNCS0805BKE10K0/1800067, Composition="Thin Film", Features="Anti-Corrosive, Automotive AEC-Q200, Moisture Resistant", Height - Seated (Max)="0.026\" (0.65mm)", lastupdated="02.01.2023 20:44:52", Lifecycle Status=Active, Minimum Order=1, Number of Terminations=2, Package / Case="0805 (2012 Metric)", packaging=TapeAndReel, Part Number=RNCS0805BKE10K0, Part Status=Active, partid=27713, price=0.09, Resistance="10 kOhms", series=RNCS, Size / Dimension="0.079\" L x 0.049\" W (2.00mm x 1.25mm)", Supplier 1=DigiKey
R27: library part ROX1SJ330K, "Resistor", Manufacturer_Name="TE Connectivity", Mouser Part Number=279-ROX1SJ330K, Datasheet Link=http://www.te.com/commerce/DocumentDelivery/DDEController?Action=showdoc&DocId=Data+Sheet%7F1773271%7FE%7Fpdf%7FEnglish%7FENG_DS_1773271_E.pdf%7F1625886-2, Manufacturer_Part_Number=ROX1SJ330K, Mouser Price/Stock=http://www.mouser.com/Search/ProductDetail.aspx?qs=ip69W3eHERVe%2fUOZ1paVUg%3d%3d
R28: "https://www.tme.eu/pl/details/ax10wv-47r/rezystory-mocy/royal-ohm/prmaawjw470b00/"
RL1: "https://www.tme.eu/pl/details/g2r-1a-e-24dc/przekazniki-elektromagn-miniaturowe/omron-ocb/g2r-1a-e-24vdc/"
RV1: library part B72220Q0271K101, "B72220S0271K101", Manufacturer_Name=TDK, Mouser Part Number=871-B72220Q271K101, Arrow Part Number=B72220Q0271K101, Arrow Price/Stock=https://www.arrow.com/en/products/b72220q0271k101/epcos-tdk, Datasheet Link=https://product.tdk.com/system/files/dam/doc/product/protection/voltage/lead-disk-varistor/data_sheet/70/db/var/siov_leaded_energetiq.pdf, Height=27mm, Manufacturer_Part_Number=B72220Q0271K101, Mouser Price/Stock=https://www.mouser.co.uk/ProductDetail/EPCOS-TDK/B72220Q0271K101?qs=dEfas%2FXlABKTVg%252B2uP1HuA%3D%3D
TP1 TP2 TP3 TP4 TP5 TP6 TP7 TP8 TP9 TP10 TP11 TP12 TP13 TP14 TP15 TP16 TP17 TP18 TP19 TP20: library part Testpoint
U2: "No Description Available", Mfr_Name="Traco Power", Copyright="Copyright (C) 2022 Ultra Librarian. All rights reserved.", Digi-Key_Part_Number_1=1951-3431-ND, Manufacturer_Part_Number="TBA 2-0513", RefDes=RefDes, Type=DEV
U14: "No Description Available", Mfr_Name=Microchip, Copyright="Copyright (C) 2022 Ultra Librarian. All rights reserved.", Manufacturer_Part_Number=MCP3002-I/SN, RefDes=RefDes, Type=DEV

## Nets (pads, with @x,y where several pads share a name; then routed paths per layer and width w, separated by ;. In a path a pad name is that pad's centre, name@x,y a point inside that pad or via, vN(x,y) a via of type N, cw(c..) or ccw(c..) an arc to the next point about the centre after c; other vN are vias at no path point)
+3V3: C1.2 C23.2 C26.2 L1.1 U1.6 U9.6
+5: C2.2 J5.2 TP1.1 U2.1
+5_HOT: C3.2 C4.2 C5.2 C6.2 C7.2 C8.2 C25.2 C30.2 C34.2 C36.2 IC1.2 IC1.4 L2.2 R8.2 TP11.1 U1.1 U3.6 U4.6 U5.6 U6.6 U7.6 U8.6 U11.6 U13.6 U15.6
+15_HOT: C9.2 C10.1 C14.2 C15.2 C19.2 C37.2 IC1.3 IPM1.10 IPM1.15 TP8.1 U2.6 U16.6
+24: D2.2 J5.1 J6.1 RL1.2
+Ug: C39.1 C40.1 C43.2 D1.K IPM1.26 J1.1 R15.2 R23.2 R24.2 R28.2 RL1.4
-Ug: C39.2 C40.2 C43.1 R23.1 R24.1
AC-L: F1.1 J3.2
AC-N: J3.3 L3.1
ADC_CLK: J5.14 R21.1
ADC_CS: J5.13 R20.1
ADC_MISO: J5.8 U9.5
ADC_MOSI: J5.9 R13.1
B-: D1.A J1.2 Q1.2
BRAKE: J5.3 R22.1
EARTH: C41.2 C42.1 C44.2 C45.1 J2.3 J3.1 MH3.1 MH4.1
GND: C1.1 C2.1 C23.1 C26.1 C27.1 C28.1 C29.1 C32.1 C33.1 IC2.2 J5.11 J5.19 J5.20 J6.2 TP13.1 U1.4 U2.2 U3.3 U4.3 U5.3 U6.3 U7.3 U8.3 U9.4 U10.5 U11.3 U12.5 U13.3 U15.3 U16.3
GNDH: C3.1 C4.1 C5.1 C6.1 C7.1 C8.1 C9.1 C10.2 C14.1 C15.1 C19.1 C24.1 C25.1 C30.1 C31.1 C34.1 C35.1 C36.1 C37.1 C45.2 DB1.4 IC1.1 IPM1.11 IPM1.18 J4.3 Q1.3 R11.1 R12.1 R14.1 R19.1 R26.1 TP10.1 U2.4 U3.4 U4.4 U5.4 U6.4 U7.4 U8.4 U9.3 U11.4 U13.4 U14.4 U15.4 U16.4
HinU: J5.4 R6.1
HinV: J5.5 R3.1
HinW: J5.6 R4.1
I_U: C28.2 J5.10 TP14.1 U10.7
I_V: C32.2 J5.12 TP16.1 U12.7
IGBT_flt: J5.7 U1.5
IGBT_Temp: IPM1.19 R8.1 TP17.1 U14.3
LinU: J5.17 R5.1
LinV: J5.16 R1.1
LinW: J5.15 R2.1
NetC11_1: C11.1 C16.1 C22.1 IPM1.2
NetC11_2: C11.2 C16.2 C22.2 IPM1.1
NetC12_1: C12.1 C17.1 C20.1 IPM1.4
NetC12_2: C12.2 C17.2 C20.2 IPM1.3
NetC13_1: C13.1 C18.1 C21.1 IPM1.6
NetC13_2: C13.2 C18.2 C21.2 IPM1.5
NetC24_2: C24.2 IPM1.17 R9.1 TP9.1
NetC27_2: C27.2 L1.2 TP15.1 U10.8 U12.8
NetC29_2: C29.2 U10.6
NetC31_2: C31.2 R18.1 R19.2 U14.2
NetC33_2: C33.2 U12.6
NetC35_2: C35.2 L2.1 U14.8
NetC38_1: C38.1 C41.1 DB1.2 L3.4 R27.2
NetC38_2: C38.2 C42.2 DB1.3 L3.2 R27.1
NetD2_1: D2.1 IC2.3 RL1.1
NetF1_2: F1.2 L3.3 RV1.2
NetIC2_1: IC2.1 R29.2
NetIPM1_7: IPM1.7 TP3.1 U3.5
NetIPM1_8: IPM1.8 TP4.1 U8.5
NetIPM1_9: IPM1.9 TP5.1 U4.5
NetIPM1_12: IPM1.12 TP6.1 U5.5
NetIPM1_13: IPM1.13 U6.5
NetIPM1_14: IPM1.14 TP7.1 U7.5
NetIPM1_16: IPM1.16 R7.2 TP2.1
NetIPM1_20: IPM1.20 IPM1.21 IPM1.22 R9.2 R11.2 R12.2 R14.2
NetIPM1_24: IPM1.24 U12.1 U12.2
NetIPM1_25: IPM1.25 U10.1 U10.2
NetQ1_1: Q1.1 R25.2 R26.2
NetR1_2: R1.2 U6.1
NetR2_2: R2.2 U7.1
NetR3_2: R3.2 U8.1
NetR4_2: R4.2 U4.1
NetR5_2: R5.2 U5.1
NetR6_2: R6.2 U3.1
NetR7_1: R7.1 U1.3
NetR10_1: R10.1 U9.1
NetR10_2: R10.2 TP12.1 U14.6
NetR13_2: R13.2 U11.1
NetR15_1: R15.1 R16.2
NetR16_1: R16.1 R17.2
NetR17_1: R17.1 R18.2
NetR20_2: R20.2 U13.1
NetR21_2: R21.2 U15.1
NetR22_2: R22.2 U16.1
NetR25_1: R25.1 U16.5
NetTP18_1: TP18.1 U13.5 U14.1
NetTP19_1: TP19.1 U11.5 U14.5
NetTP20_1: TP20.1 U14.7 U15.5
P0: DB1.1 J4.1
P1: C44.1 J4.2 R28.1 RL1.3
Softstart: J5.18 R29.1
U_phase: J1.3 U10.3 U10.4
V_phase: J2.1 U12.3 U12.4
W_phase: IPM1.23 J2.2
pads on no net: DB1. IPM1. MH5.1 MH6.1 MH7.1 MH8.1 Q1. RV1.1

## Silkscreen, mask and mechanical layers (free items; w line width, h text height)
Top Overlay:
  text "PE" at 62.254,202.854 h1.52
  text "-" at 19.154,202.792 h1.52
  text "P1" at 26.454,202.754 h1.52
  text "N" at 47.654,202.754 h1.52
  text "L" at 55.354,202.754 h1.52
  text "P0" at 33.854,202.654 h1.52
  text "+DC" at 17.954,10.854 h1.52
  text "U" at 34.354,10.854 h1.52
  text "V" at 42.054,10.854 h1.52
  text "PE" at 56.554,10.854 h1.52
  text "B" at 26.954,10.754 h1.52
  text "W" at 49.554,10.654 h1.52

## Text inside footprints (layer, text, board x,y; h text height)
C10: Top Overlay "+" at 523.25,60.25 h2
C39: Bottom Overlay "+" at 17.25,23.3 h2 r90
C40: Bottom Overlay "+" at 57.25,23.3 h2 r90
DB1: Bottom Overlay "~" at 52.746,144.984 h1.52; Bottom Overlay "~" at 60.446,144.984 h1.52; Bottom Overlay "-" at 45.246,145.692 h1.52; Bottom Overlay "+" at 70.546,145.7 h1.52
F1: Top Overlay "F10A" at 54.654,198.354 h1.52
IPM1: Top Overlay "N" at 31.304,56.996 h1.52 r270; Top Overlay "W" at 41.304,57.496 h1.52 r270; Top Overlay "V" at 46.304,57.496 h1.52 r270; Top Overlay "U" at 51.554,57.496 h1.52 r270; Top Overlay "P" at 56.554,57.246 h1.52 r270; Top Overlay "26" at 59.554,59.504 h1.52; Top Overlay "20" at 22.054,59.254 h1.52; Top Overlay "19" at 22.354,83.754 h1.52; Top Overlay "1" at 55.704,83.754 h1.52
U2: Top Overlay "*" at 77.278,122.635 h1.27 r180; Mechanical 13 "*" at 76.008,122.635 h1.27 r180
U14: Top Overlay "*" at 173.066,59.336 h1.27; Mechanical 13 "*" at 174.108,58.105 h1.27